# EAGLE board FanController (EAGLE 9.6.2)
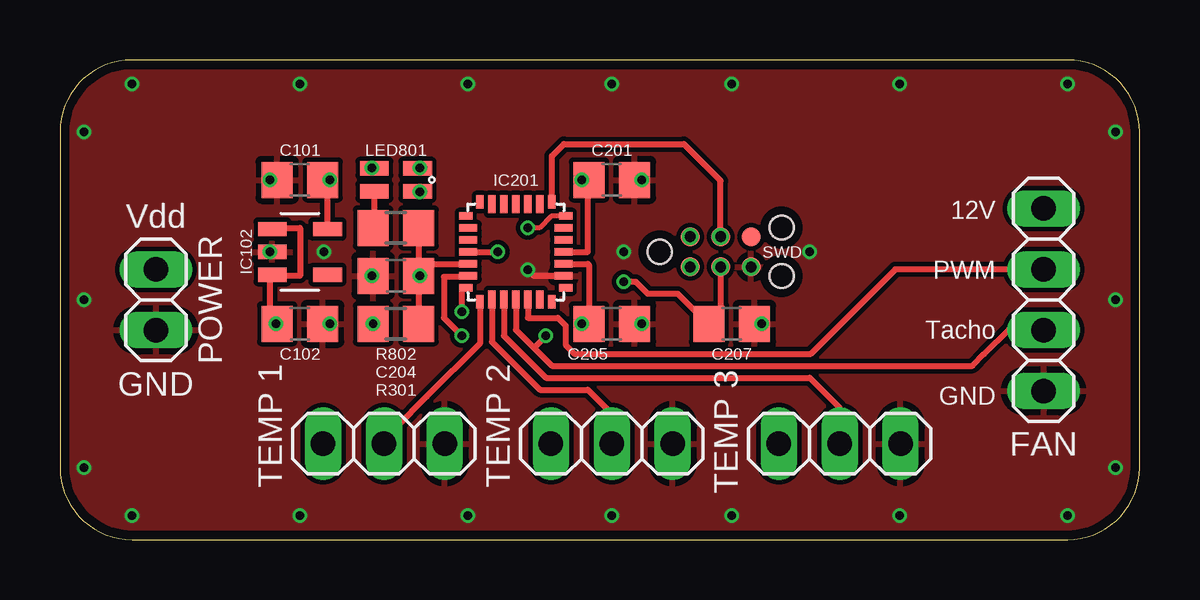
[diagram p0: board, top side]
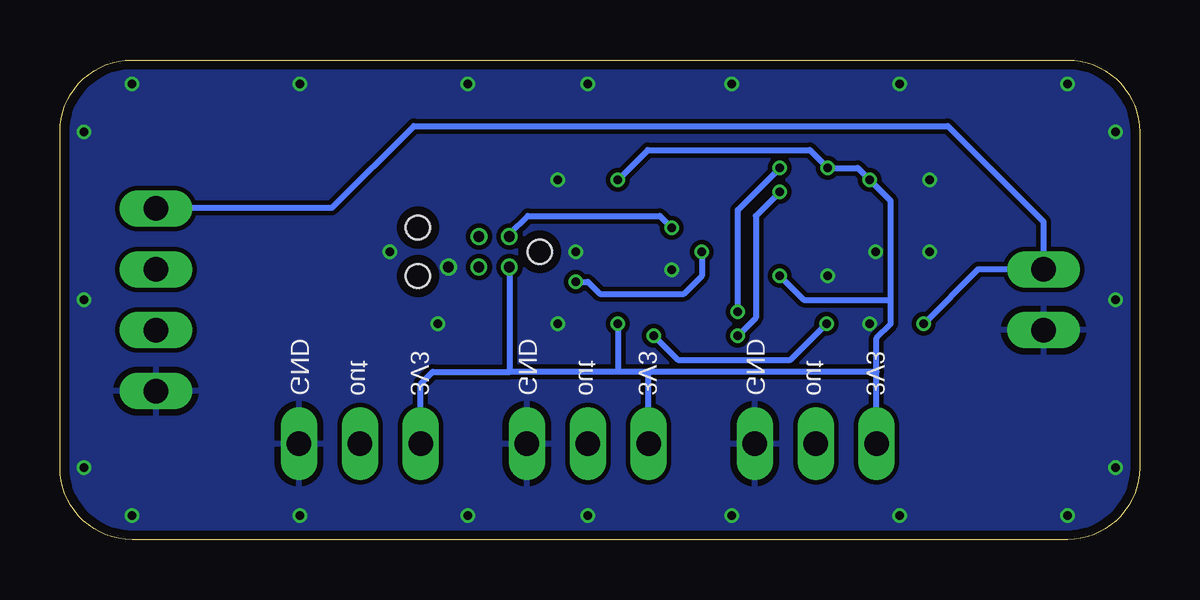
[diagram p1: board, bottom side, seen from below]

Size 45 x 20 mm. Coordinates in mm from the lower left corner, seen from the top.
Outline: 42,20 3,20 arc90 0,17 0,3 arc90 3,0 42,0 arc90 45,3 45,17 arc90 42,20
Copper layers (1*16): Top 0.035559375mm / dielectric 1.6mm / Bottom 0.035559375mm
Design rules "oshpark-2layer": minimum track width 6mil, minimum drill 10mil, track to track 6mil, track to pad 6mil, pad to pad 6mil, via to via 6mil, smd to smd 6mil, copper to edge 15mil, drill to drill 6mil, minimum pad ring 5mil, minimum via ring 5mil, stop-mask expansion 2.5mil, vias tented up to drill 0mil, thermal gap 10mil
Net classes: 0 GND: width 0.25 mm, drill 0.35 mm, clearance 0.19 mm; 1 signal: width 0.25 mm, drill 0.35 mm, clearance 0.2 mm to class 0; 4 3V3: width 0.25 mm, drill 0.35 mm, clearance 0.2 mm to class 0, clearance 0.2 mm to class 1, clearance 0.19 mm

## Footprints (pad centres in the part's own frame; a part is rotated, then mirrored left to right if it is on the bottom)
C0805 = smd 1.3 x 1.5: 1 -0.95,0; 2 0.95,0
SOT-23-5L = smd 0.6 x 1.2: ADJ/NC -0.95,-1.15; EN -0.95,1.15; GND 0,1.15; IN 0.95,1.15; OUT 0.95,-1.15
UFQFPN-28 = smd 0.55 x 0.3: 1_PB8 -2.08,1.5; 7_PA1 -2.08,-1.5; 15_PB1 2.08,-1.5; 21_PA13 2.08,1.5 | smd 0.75 x 0.3: 2_PF0 -1.98,1; 3_PF1 -1.98,0.5; 4_NRST -1.98,0; 5_VDDA -1.98,-0.5; 6_PA0 -1.98,-1; 16_VSS 1.98,-1; 17_VDD 1.98,-0.5; 18_VDDIO2 1.98,0; 19_PA9-[PA11] 1.98,0.5; 20_PA10-[PA12] 1.98,1 | smd 0.3 x 0.55: 8_PA2 -1.5,-2.08; 14_PB0 1.5,-2.08; 22_PA14 1.5,2.08; 28_PB7 -1.5,2.08 | smd 0.3 x 0.75: 9_PA3 -1,-1.98; 10_PA4 -0.5,-1.98; 11_PA5 0,-1.98; 12_PA6 0.5,-1.98; 13_PA7 1,-1.98; 23_PA15 1,1.98; 24_PB3 0.5,1.98; 25_PB4 0,1.98; 26_PB5 -0.5,1.98; 27_PB6 -1,1.98
1X02 = drill 1.016 long: 1 -1.27,0; 2 1.27,0
SMD = smd 1.2 x 0.6: 1 0.9,0.48; 2 -0.9,0.48; 3 -0.9,-0.48; 4 0.9,-0.48
R0805 = smd 1.3 x 1.5: 1 -0.95,0; 2 0.95,0
1X04 = drill 1.016 long: 1 -3.81,0; 2 -1.27,0; 3 1.27,0; 4 3.81,0
TC2030-NL = smd 0.787 x 0.787: 1_TVCC 1.27,-0.635; 2_T_SWDIO 1.27,0.635; 3_T_NRST 2.54,-0.635; 4_T_SWCLK 2.54,0.635; 5_GND 3.81,-0.635; 6_T_SWO 3.81,0.635 | hole 0.991: 0,0; 5.08,-1.016; 5.08,1.016
1X03 = drill 1.016 long: 1 -2.54,0; 2 0,0; 3 2.54,0

## Placement (x,y rotation side)
C101  1μF / 50V  [C0805]  10,15 180 top
C102  1μF / 50V  [C0805]  10,9 0 top
C201  0.1u  [C0805]  23,15 180 top
C204  1u  [C0805]  14,11 0 top
C205  0.1u  [C0805]  23,9 180 top
C207  0.1u  [C0805]  28,9 180 top
IC102  LDK320AM33R  [SOT-23-5L]  10,12 90 top
IC201  STM32F042G6U6  [UFQFPN-28]  19,12 0 top
JP101  n/a  [1X02]  4,10 90 top
LED801  APHBM2012SURKZGKC  [SMD]  14,15 180 top
R301  10k  [R0805]  14,9 0 top
R802  68R  [R0805]  14,13 180 top
SV301  n/a  [1X04]  41,10 90 top
SWD101  TC2030-NL  [TC2030-NL]  25,12 0 top
TEMP400  LMT86LPM  [1X03]  13.5,4 0 top
TEMP500  LMT86LPM  [1X03]  23,4 0 top
TEMP600  LMT86LPM  [1X03]  32.5,4 0 top

## Library data of the parts
C101 C102 C201 C204 C205 C207 = rcl; SPICEPREFIX: C
IC102 = LDK320 5V LDO
IC201 = STM32F042G6
JP101 SV301 TEMP400 TEMP500 TEMP600 = pinhead
LED801 = APHBM2012LSURKZGKC
R301 R802 = rcl; SPICEPREFIX: R
SWD101 = tag-connect

## Nets
3V3 [3V3]: C101.1 C201.2 C204.2 C205.2 IC102.OUT IC201.5_VDDA IC201.17_VDD IC201.18_VDDIO2 LED801.4 R301.2 R802.1 SWD101.1_TVCC TEMP400.1 TEMP500.1 TEMP600.1
FAN_PWM [signal]: IC201.12_PA6 SV301.3
FAN_TACHO [signal]: IC201.11_PA5 R301.1 SV301.2
GND: C101.2 C102.2 C201.1 C204.1 C205.1 C207.1 IC102.GND IC201.16_VSS JP101.1 SV301.1 SWD101.5_GND TEMP400.3 TEMP500.3 TEMP600.3
LED1:R_A [signal]: LED801.1 R802.2
LED_GREEN: IC201.7_PA1 LED801.3
LED_RED: IC201.6_PA0 LED801.2
SYS_NRST [signal]: C207.2 IC201.4_NRST SWD101.3_T_NRST
SYS_SWCLK [signal]: IC201.22_PA14 SWD101.4_T_SWCLK
SYS_SWDIO [signal]: IC201.21_PA13 SWD101.2_T_SWDIO
TEMP1 [signal]: IC201.8_PA2 TEMP400.2
TEMP2 [signal]: IC201.9_PA3 TEMP500.2
TEMP3 [signal]: IC201.10_PA4 TEMP600.2
VDD [3V3]: C102.1 IC102.EN IC102.IN JP101.2 SV301.4

## Tracks (layer width: path | path; a pad name or v marks a point on that pad's centre or on a via)
3V3  (via drill 0.35, 0.45)
  Top 0.25: IC102.OUT 11.15,14.8 C101.1 v11.25,15 | IC201.17_VDD 22,11.5 22.05,11.45 C205.2 v21.75,9 | IC201.18_VDDIO2 22,12 22,15 C201.2 v21.75,15 | SWD101.1_TVCC v26.27,11.36 | IC201.5_VDDA 15.45,11.5 C204.2 | R802.1 14.95,11.05 v15,11 C204.2 | LED801.4 13.02,15.48 v13,15.5 | C204.2 R301.2
  Bottom 0.25: 10.96,7 20.5,7 | 20.5,7 21.75,7 | 21.75,7 26.25,7 | 26.25,7 29.46,7 29.96,6.5 TEMP600.1 | v21.75,9 21.75,7 | 26.25,7 26.27,7.02 v26.27,11.36 | 20.5,7 20.5,4.04 TEMP500.1 | v21.75,15 20.5,16.25 13.75,16.25 v13,15.5 11.75,15.5 v11.25,15 10.37,14.12 10.37,10 | v15,11 14,10 10.37,10 | 10.96,7 10.96,8.4 10.37,8.99 10.37,10 | TEMP400.1 10.96,7
FAN_PWM
  Top 0.25: IC201.12_PA6 19.5,9.25 20.75,9.25 21.07,8.93 21.07,8.12 21.44,7.75 31.3,7.75 34.82,11.27 SV301.3
FAN_TACHO  (via drill 0.35)
  Top 0.25: IC201.11_PA5 19,8.75 19.75,8 | 19.75,8 20.5,7.25 38.04,7.25 38.52,7.73 39.55,8.76 41,8.76 SV301.2 | v20.25,8.5 19.75,8
  Bottom 0.25: R301.1 14.55,7.5 19.25,7.5 v20.25,8.5
  other vias: 13.05,9
GND  (via drill 0.35, 0.45)
  Top 0.25: IC201.16_VSS 19.75,11 v19.5,11.25
  other vias: 28.81,11.36 24.25,15 24.25,9 29.25,9 11.25,9 8.75,12 8.75,15 13,11 1,3 3,1 1,17 3,19 42,19 44,17 44,3 42,1 44,10 1,10 10,1 17,1 23,1 23,19 28,1 35,1 17,19 10,19 28,19 35,19 23.5,12 31.25,12 11,12
  pour Top: -1,21 46,21 46,-1 -1,-1
  pour Bottom: -1,21 46,21 46,-1 -1,-1
LED1:R_A
  Top 0.25: LED801.1 13.1,13.05 R802.2
LED_GREEN  (via drill 0.35)
  Top 0.25: LED801.3 14.92,15.5 v15,15.5 | v16.75,9.5 16.75,10.5 IC201.7_PA1
  Bottom 0.25: v16.75,9.5 16.75,13.75 v15,15.5
LED_RED  (via drill 0.35)
  Top 0.25: LED801.2 14.98,14.52 v15,14.5 | v16.75,8.5 16,9.25 16,10.96 16.98,10.96 IC201.6_PA0
  Bottom 0.25: v16.75,8.5 16,9.25 16,13.5 v15,14.5
SYS_NRST  (via drill 0.35, 0.45)
  Top 0.25: IC201.4_NRST v18.25,12 | v23.5,10.75 24,10.75 24.5,10.25 25.75,10.25 27,9 C207.2 27.54,9.49 v27.54,11.36 SWD101.3_T_NRST
  Bottom 0.25: v18.25,12 18.25,11 19,10.25 22.5,10.25 23,10.75 v23.5,10.75
SYS_SWCLK  (via drill 0.45)
  Top 0.25: IC201.22_PA14 20.5,16 21,16.5 26,16.5 27.54,14.96 SWD101.4_T_SWCLK
  other vias: 27.54,12.63
SYS_SWDIO  (via drill 0.35, 0.45)
  Top 0.2: IC201.21_PA13 21.07,13.49 20.48,13.49 19.99,13 v19.5,13
  Top 0.25: SWD101.2_T_SWDIO v26.27,12.64
  Bottom 0.25: v26.27,12.64 26.27,12.73 25.5,13.5 20,13.5 v19.5,13
TEMP1
  Top 0.25: IC201.8_PA2 17.5,8.17 15.29,5.96 14,4.67 13.5,4.17 TEMP400.2
TEMP2
  Top 0.25: IC201.9_PA3 18,8.25 20,6.25 22,6.25 23,5.25 TEMP500.2
TEMP3
  Top 0.25: IC201.10_PA4 18.5,8.5 20.25,6.75 31.25,6.75 32.5,5.5 TEMP600.2
VDD  (via drill 0.35)
  Top 0.25: 8.85,11 8.75,11 8.75,9.3 C102.1 v9,9 | 8.85,11 IC102.EN | IC102.IN 8.9,13 10,13 10,11 8.85,11
  Bottom 0.25: SV301.4 41,13.84 33.66,13.84 30.25,17.25 8,17.25 4,13.25 JP101.2 6.73,11.27 v9,9

## Text on the board
tPlace: Vdd | 12V | PWM | POWER | Tacho | GND | GND | TEMP 1 | TEMP 2 | TEMP 3 | FAN
bPlace: 3V3 | out | GND | 3V3 | out | GND | 3V3 | out | GND
tStop: FanController | ejovrh / rev. 2